# Altium PCB PCB2.PcbDoc (part 3 of 3)
Units mil, origin at the board's own origin, x right, y up, seen from the top; angles counter-clockwise.
Board outline 7178.34 x 3937 mil, 2 copper layers (Top Layer, Bottom Layer); 141 components, 57 nets, 393 pads, 76 vias.
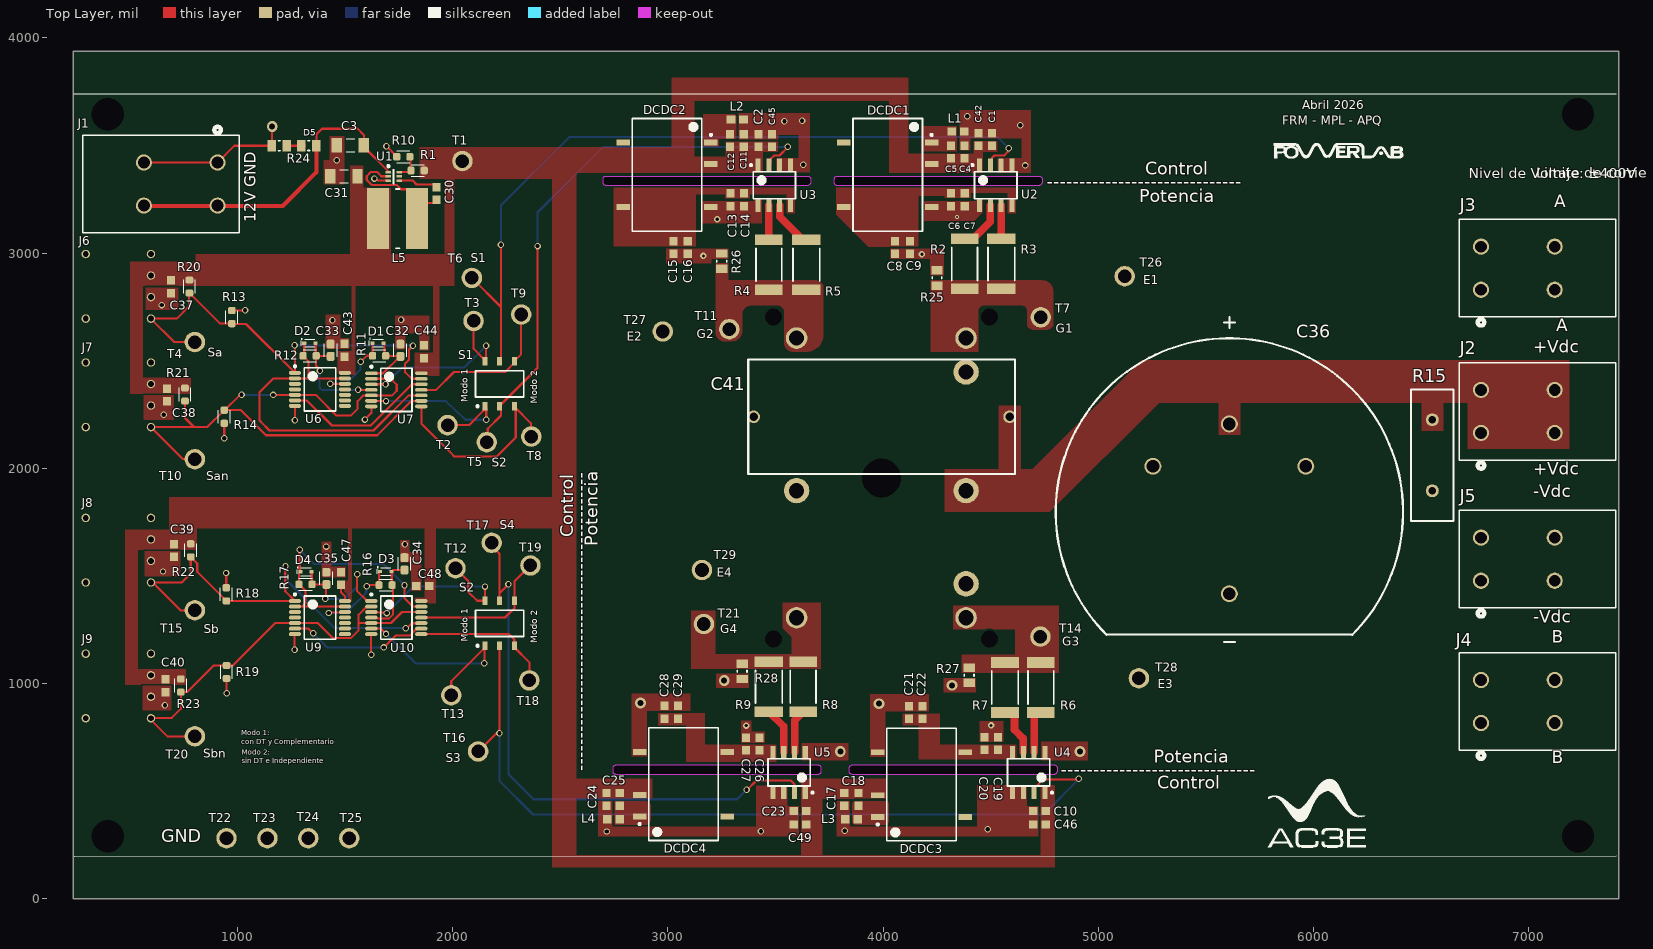
[diagram p0: Top Layer view]

## Via types
v1: diameter 30, hole 20, Top Layer to Bottom Layer, 63 vias
v2: diameter 50, hole 28, Top Layer to Bottom Layer, 7 vias
v3: diameter 30, hole 15, Top Layer to Bottom Layer, 5 vias
v4: diameter 20, hole 10, Top Layer to Bottom Layer, 1 vias

## Nets (pads, with @x,y where several pads share a name; then routed paths per layer and width w, separated by ;. In a path a pad name is that pad's centre, name@x,y a point inside that pad or via, vN(x,y) a via of type N, cw(c..) or ccw(c..) an arc to the next point about the centre after c; other vN are vias at no path point) (continued)
Sb*: (continued)
  Top Layer w10: U10.6 1665.18,1255.82 v1(1690,1231) ; T13.1 1993,1011.69 S2.1@2148.05,1166.74 ; v1(2147,1094) 2148.05,1095.05 S2.1@2148.05,1166.74 ; S2.1@2148.05,1174.62 S2.1@2148.05,1166.74
  Bottom Layer w10: v1(1690,1231) 1827,1094 v1(2147,1094)
Sb_dt: C34.2 D3.2 R16.1 U10.4 | length 377.1
  Top Layer w10: U10.4 1643.63,1307 1647.63,1303 1704.36,1303 1723,1321.64 1723,1453.51 R16.1 1716.75,1459.76 1716.75,1519.24 D3.2 1716.56,1521 1723.56,1528 C34.2
Sbn*: S2.6 T19.1 U10.11 | length 679.7
  Top Layer w10: U10.11 2243,1307 2286.9,1350.9 2286.9,1474.9 T19.1
Sbp*: S2.3 T18.1 U10.8 | length 661.6
  Top Layer w10: U10.8@1854.14,1231 2260,1231 2286,1205 2286,1176.57 S2.3 2286.9,1167.8 2356,1098.69 T18.1
VCC1: C6.2 C7.2 C8.1 C9.1 DCDC1.5 U2.5
VCC2: C13.2 C14.2 C15.1 C16.1 DCDC2.5 U3.5
VCC3: C19.2 C20.2 C21.1 C22.1 DCDC3.5 U4.5
VCC4: C26.2 C27.2 C28.1 C29.1 DCDC4.5 U5.5
Vdc: C36.V+ C41.2 J2.1 J2.2 J2.3 J2.4 R15.2 U8.5
pads on no net: C36.2 C36.3 DCDC1.8 DCDC2.8 DCDC3.8 DCDC4.8 J6.4 J6.5 J6.8 J7.4 J7.5 J7.8 J8.4 J8.5 J8.8 J9.4 J9.5 J9.8 U1.5 U6.3 U6.4 U6.8 U6.9 U6.10 U6.11 U8.9@3489.38,1207.72 U8.9@3489.38,2703.79 U8.9@3991.35,1955.76 U8.9@4493.31,1207.72 U8.9@4493.31,2703.79 U9.3 U9.4 U9.8 U9.9 U9.10 U9.11

## Polygon pours and split planes (outlines as drawn)
VCC1 on Top Layer "Top Layer-No Net 1" (solid, pour order 148): 4579,3185 4616,3185 4616,3305 3782,3305 3782,3178 3930,3030 4163,3030 4163,3266 4285,3266 4285,3257 4407,3257 4407,3281 4579,3281
-Vdc on Top Layer "NONET_L-01_P-001" (solid, pour order 115): 3340,726 3449,726 3449,777 3388,777 3388,827 3340,827
Vdc on Top Layer "Top Layer-No Net" (solid, pour order 124): 6715,2306 6715,2092 7188,2092 7188,2383 7188,2503 5201,2503 4693,1995 4638,1995 4638,2290 4537,2290 4537,1995 4286,1995 4286,1798 4774,1798 5282,2306 5558,2306 5558,2156 5659,2156 5659,2306 6501,2306 6501,2176 6602,2176 6602,2306
GND on Top Layer "NONET_L-01_P-001" (solid, pour order 157): 1808,1431 1808,1564 1756,1564 1756,1667 1798,1667 1798,1611 1854,1611 1854,1431
GND on Top Layer "NONET_L-01_P-001" (solid, pour order 156): 1391,1660 1435,1660 1435,1542 1504,1542 1504,1494 1391,1494
5V on Top Layer "Top Layer-5V" (solid, pour order 107): 2462,148 4798,148 4798,529 4733,529 4733,203 3716,203 3716,464 4012,464 4012,558 3619,558 3619,383 3619,203 2573,203 2573,467 2926,467 2926,558 2573,558 2573,3374 3441,3374 3441,3471 3510,3471 3510,3518 3436,3518 3268,3518 3268,3448 3121,3448 3121,3708 4028,3708 4028,3373 4463,3373 4463,3470 4530,3470 4530,3521 4421,3521 4421,3462 4116,3462 4116,3814 3018,3814 3018,3493 1847,3493 1847,3345 1964,3345 1964,2995 1713,2995 1713,3305 1585,3305 1585,3405 1525,3405 1525,2995 806,2995 806,2960 501,2960 501,2347 782,2347 782,2422.24 559,2422.24 559,2849 1532,2849 1532,2544 1466,2544 1466,2434 1548,2434 1548,2849 1910,2849 1910,2537 1823,2537 1823,2431 1937,2431 1937,2849 2006,2849 2006,3345 2462,3345 2462,1865 684,1865 684,1715 479,1715 479,995 760,995 760,1067 537,1067 537,1622 810,1622 810,1721 1515,1721 1515,1479 1461,1479 1461,1373 1532,1373 1532,1721 1870,1721 1870,1399 1823,1399 1823,1373 1921,1373 1921,1721 2462,1721
GND on Top Layer "NONET_L-01_P-001" (solid, pour order 154): 1844,2548 1890,2548 1890,2710 1734,2710 1734,2553 1780,2553 1780,2629 1844,2629
GND on Top Layer "NONET_L-01_P-001" (solid, pour order 153): 1410,2556 1520,2556 1520,2604.21 1478.35,2604.21 1478.35,2714 1410,2714
VCC2 on Top Layer "Top Layer-VCC2" (solid, pour order 152): 3551,3186 3588,3186 3588,3304 2748,3304 2748,3032 3129,3032 3129,3274 3267,3274 3267,3254 3380,3254 3380,3274 3551,3274
-Vdc on Top Layer "NONET_L-01_P-001" (solid, pour order 150): 3435,3255 3401,3255 3401,3242 3154,3242 3154,3140 3435,3140
-Vdc on Top Layer "NONET_L-01_P-001" (solid, pour order 149): 3281,2975 3201,2975 3201,2954 2993,2954 2993,3020 3281,3020
A on Top Layer "Top Layer-A" (solid, pour order 146): 4190,3150 4424,3150 4463,3189 4463,3254 4432,3254 4432,3241 4190,3241
A on Top Layer "NONET_L-01_P-001" (solid, pour order 144): 4032,2973 4219,2973 4219,2897 4281,2897 4281,3021 4032,3021
NetC5_2 on Top Layer "NETC5_2_L01_P026" (solid, pour order 26): 4179.14,3589 4179.14,3474 4341,3474 4341,3589
-Vdc on Top Layer "NONET_L-01_P-001" (solid, pour order 140): 3375,1045 3225,1045 3225,980 3375,980
G4 on Top Layer "NONET_L-01_P-001" (solid, pour order 139): 3709,1069 3709,1375 3534,1375 3534,1257 3576,1215 3576,1136.07 3219,1136.07 3219,1338 3109,1338 3109,1069
-Vdc on Top Layer "Top Layer--Vdc" (solid, pour order 138): 3103,874 3103,953 2831,953 2831,663 2902,663 2902,874
-Vdc on Top Layer "NONET_L-01_P-001" (solid, pour order 136): 3622,723 3622,644 3837,644 3837,723
B on Top Layer "Top Layer-B" (solid, pour order 135): 4211,871 4211,950 3939,950 3939,660 4010,660 4010,871
B on Top Layer "NONET_L-01_P-001" (solid, pour order 132): 4430,1026 4282,1026 4282,961 4430,961
B on Top Layer "NONET_L-01_P-001" (solid, pour order 130): 4448,731 4557,731 4557,825 4448,825 4448,815
GND on Top Layer "Top Layer-GND" (solid, pour order 102): 1497,3321 1497,3543 1429,3543 1429,3432 1400,3432 1400,3321
GND on Top Layer "GND_L01_P081" (solid, pour order 81): 2742,454 2677,454 2677,292 3607,292 3607,430 3560,430 3554,430 3554,526 3410,526 3410,334 2742,334
B on Top Layer "NONET_L-01_P-001" (solid, pour order 112): 4735,731 4735,644 4950,644 4950,731
VCC3 on Top Layer "VCC3_L01_P008" (solid, pour order 8): 4090,860 4090,807 4166,807 4166,648 4617,648 4617,715 4262,715 4262,860
GND on Top Layer "GND_L01_P082" (solid, pour order 82): 4721,431 4667,431 4667,527 4437,527 4437,335 3845,335 3845,454 3785,454 3785,292 4721,292
VCC4 on Top Layer "VCC4_L01_P009" (solid, pour order 9): 2954,862 2954,806 3084,806 3084,637 3503,637 3503,715 3170,715 3170,862
G3 on Top Layer "NONET_L-01_P-001" (solid, pour order 93): 4365,1050 4365,1135 4614,1135 4614,1253 4325,1253 4325,1361 4816,1361 4816,1050
GND on Top Layer "GND_L01_P076" (solid, pour order 76): 3504,3440 3504,3377 3658,3377 3658,3651 3328,3651 3328,3530 3513,3530 3513,3549 3608,3549 3608,3440
NetC12_2 on Top Layer "NETC12_2_L01_P083" (solid, pour order 83): 3164,3645 3164,3497 3236,3497 3236,3531 3317,3531 3317,3645
GND on Top Layer "GND_L01_P077" (solid, pour order 77): 4532,3374 4686,3374 4686,3663 4355,3663 4355,3477 4404,3477 4404,3535 4488,3535 4538,3535 4644,3535 4644,3442 4532,3442
G2 on Top Layer "NONET_L-01_P-001" (solid, pour order 97): 3221,2954 3280,2954 3280,2872 3221,2872
G2 on Top Layer "G2_L01_P025" (solid, pour order 25): 3722,2840 3722,2621 cw(c3643,2621) 3643,2542 3579,2542 cw(c3579,2580) 3541,2580 3541,2723 ccw(c3507,2723) 3507,2757 3387,2757 ccw(c3387,2714) 3344,2714 3344,2637 cw(c3297,2637) 3297,2590 3264,2590 cw(c3264,2633) 3221,2633 3221,2873 3689,2873 cw(c3689,2840)
G1 on Top Layer "G1_L01_P024" (solid, pour order 24): 4220,2873 4220,2542 4441,2542 4441,2728 cw(c4470,2728) 4470,2757 4643,2757 cw(c4643,2731) 4669,2731 4669,2671 ccw(c4695,2671) 4695,2645 4763,2645 ccw(c4763,2672) 4790,2672 4790,2823 ccw(c4740,2823) 4740,2873
NetC25_2 on Top Layer "NETC25_2_L01_P020" (solid, pour order 20): 2752.5,454 2752.5,345 2897.5,345 ccw(c2897.5,367) 2919.5,367 2919.5,434 ccw(c2899.5,434) 2899.5,454
GND on Top Layer "GND_L01_P051" (solid, pour order 51): 573,2840 573,2736 725,2736 725,2840
GND on Top Layer "GND_L01_P053" (solid, pour order 53): 704,2225 704,2339 565,2339 565,2225
GND on Top Layer "GND_L01_P038" (solid, pour order 38): 693,876 693,990 559,990 559,876
GND on Top Layer "GND_L01_P041" (solid, pour order 41): 569,1614 569,1499 733,1499 733,1614
NetC18_2 on Top Layer "NETC18_2_L01_P019" (solid, pour order 19): 3857,442 3857,360 ccw(c3872,360) 3872,345 4011,345 ccw(c4011,359) 4025,359 4025,441 ccw(c4012,441) 4012,454 3869,454 ccw(c3869,442)
-Vdc on Bottom Layer "NONET_L-01_P-001" (solid, pour order 103): 6421.44,1781.56 6515.91,1977.68 6615.55,1907.5 6507.52,1695.48
-Vdc on Bottom Layer "NONET_L-01_P-001" (solid, pour order 105): 3348,1978 3348,2290 3448,2290 3448,1978
A on Bottom Layer "Bottom Layer-A" (solid, pour order 120): 6732,2744 7188,2744 7188,3112 6732,3112 6732,3027 5732,3027 5484,2779 5191,2779 5191,2970 5051,2970 5051,2779 4924,2779 4692,2547 4516,2547 4505,2536 4150,2536 4150,2905 4280,3035 4378,3133 4378,3197 4236,3197 3960,2921 3960,2360 4506,2360 4517,2349 4773,2349 5006,2582 5574,2582 5821,2829 6732,2829
GND on Bottom Layer "GND_L02_P054" (solid, pour order 54): 4660,358 1903,358 1903,3571 4635,3571 4635,3372 4904,3372 4904,3731 494,3731 494,3484 1034,3484 1034,3079 494,3079 494,203 4660,203
-Vdc on Bottom Layer "Bottom Layer--Vdc" (solid, pour order 142): 6732,1395 7188,1395 7188,1758 6732,1758 6732,1673 6531,1673 6422,1782 3797,1782 3797,1979.25 3108,1979.25 3108,2845 3257,2845 3257,3178 2904.53,3178 2904.53,1818.82 3513.78,1818.82 3513.78,1606 2767,1606 2767,782 3390,782 3390,1050 3002.95,1050 3002.95,1461 3708,1461 3708,642 3836,642 3836,1595 5558,1595 5558,1363 5658,1363 5658,1575 6391,1575 6491,1475 6732,1475
B on Bottom Layer "Bottom Layer-B" (solid, pour order 131): 6732,733 7188,733 7188,1101 6732,1101 6732,1016 5643,1016 5158,1501 5053,1501 4530,1501 4490,1541 4316,1541 4305,1530 3943,1530 3943,873 4022,873 4368,873 4368,731 4735,731 4735,644 4984,644 4984,830 4438,830 4438,1026 4219,1026 4219,1395.67 4219.33,1396 4330,1396 4345,1381 4423,1381 4479,1325 5055,1325 5222,1158 5087,1023 5186,924 5321,1059 5562,818 6732,818

## Silkscreen, mask and mechanical layers (free items; w line width, h text height)
Top Overlay:
  drawing of 15 lines, arcs and shapes, not listed
  text "Abril 2026" at 5946.93,3668.39 h40
  text "FRM - MPL - APQ" at 5853.46,3596.57 h40
  text "Control" at 5218,3365 h60
  text "Limite de corriente: 15A" at 7035,3334 h80
  text "Nivel de Voltaje: ±400V" at 6720,3331 h80
  text "GND" at 1102.75,3306 h90 r90
  text "------------------------------" at 4761,3304.01 h60
  text "Potencia" at 5189,3237 h60
  text "A" at 7117.09,3193 h100
  text "12V" at 1103.75,3144 h90 r90
  text "S1" at 2084,2958 h40
  text "E1" at 5208,2856 h40
  text "G1" at 4801,2631 h40
  text "A" at 7126.09,2616 h100
  text "G2" at 3134,2604 h40
  text "E2" at 2809,2594 h40
  text "Sa" at 862,2518 h40
  text "+Vdc" at 7020,2515.39 h100
  text "Modo 1" at 2069,2308 h30 r90
  text "Modo 2" at 2392,2301 h30 r90
  text "S2" at 2182,2007 h40
  text "+Vdc" at 7020,1949.39 h100
  text "San" at 854,1946 h40
  text "-Vdc" at 7020,1845.39 h100
  text "S4" at 2219,1717 h40
  text "Control" at 2560,1680 h60 r90
  text "Potencia" at 2674,1638 h60 r90
  text "E4" at 3226,1497 h40
  text "-Vdc" at 7020,1261.39 h100
  text "Sb" at 844,1235 h40
  text "G4" at 3242,1235 h40
  text "Modo 1" at 2069,1195 h30 r90
  text "Modo 2" at 2392,1188 h30 r90
  text "G3" at 4832,1175 h40
  text "B" at 7106,1170 h100
  text "E3" at 5275,978 h40
  text "Modo 1: / con DT y Complementario" at 1018.5,710 h40
  text "Sbn" at 842,656 h40
  text "S3" at 1967,634 h40
  text "Potencia" at 5257,632 h60
  text "Modo 2: / sin DT e Independiente" at 1019.5,621 h40
  text "B" at 7106,609 h100
  text "----------------------------------------------" at 2622.99,592 h60 r90
  text "------------------------------" at 4826,571.01 h60
  text "Control" at 5273,512 h60
  text "GND" at 645,262 h60
Bottom Overlay:
  drawing of 13 lines, arcs and shapes, not listed
  text "GND" at 1131.75,3477 h90 r90
  text "12V" at 1133.75,3272 h90 r90
  text "A" at 7240.91,3193 h100
  text "A" at 7249.91,2616 h100
  text "+Vdc" at 7322,2515.39 h100
  text "+Vdc" at 7322,1949.39 h100
  text "-Vdc" at 7322,1845.39 h100
  text "-Vdc" at 7322,1261.39 h100
  text "B" at 7213,1170 h100
  text "B" at 7213,609 h100